# Altium PCB PCB1.PcbDoc
Units mil, origin at the board's own origin, x right, y up, seen from the top; angles counter-clockwise.
Board outline 4046.03 x 2791.03 mil, 4 copper layers (Top Layer, Mid-Layer, Signal Layer 1, Bottom Layer), stack 30.617 mil thick; 45 components, 39 nets, 154 pads, 26 vias.
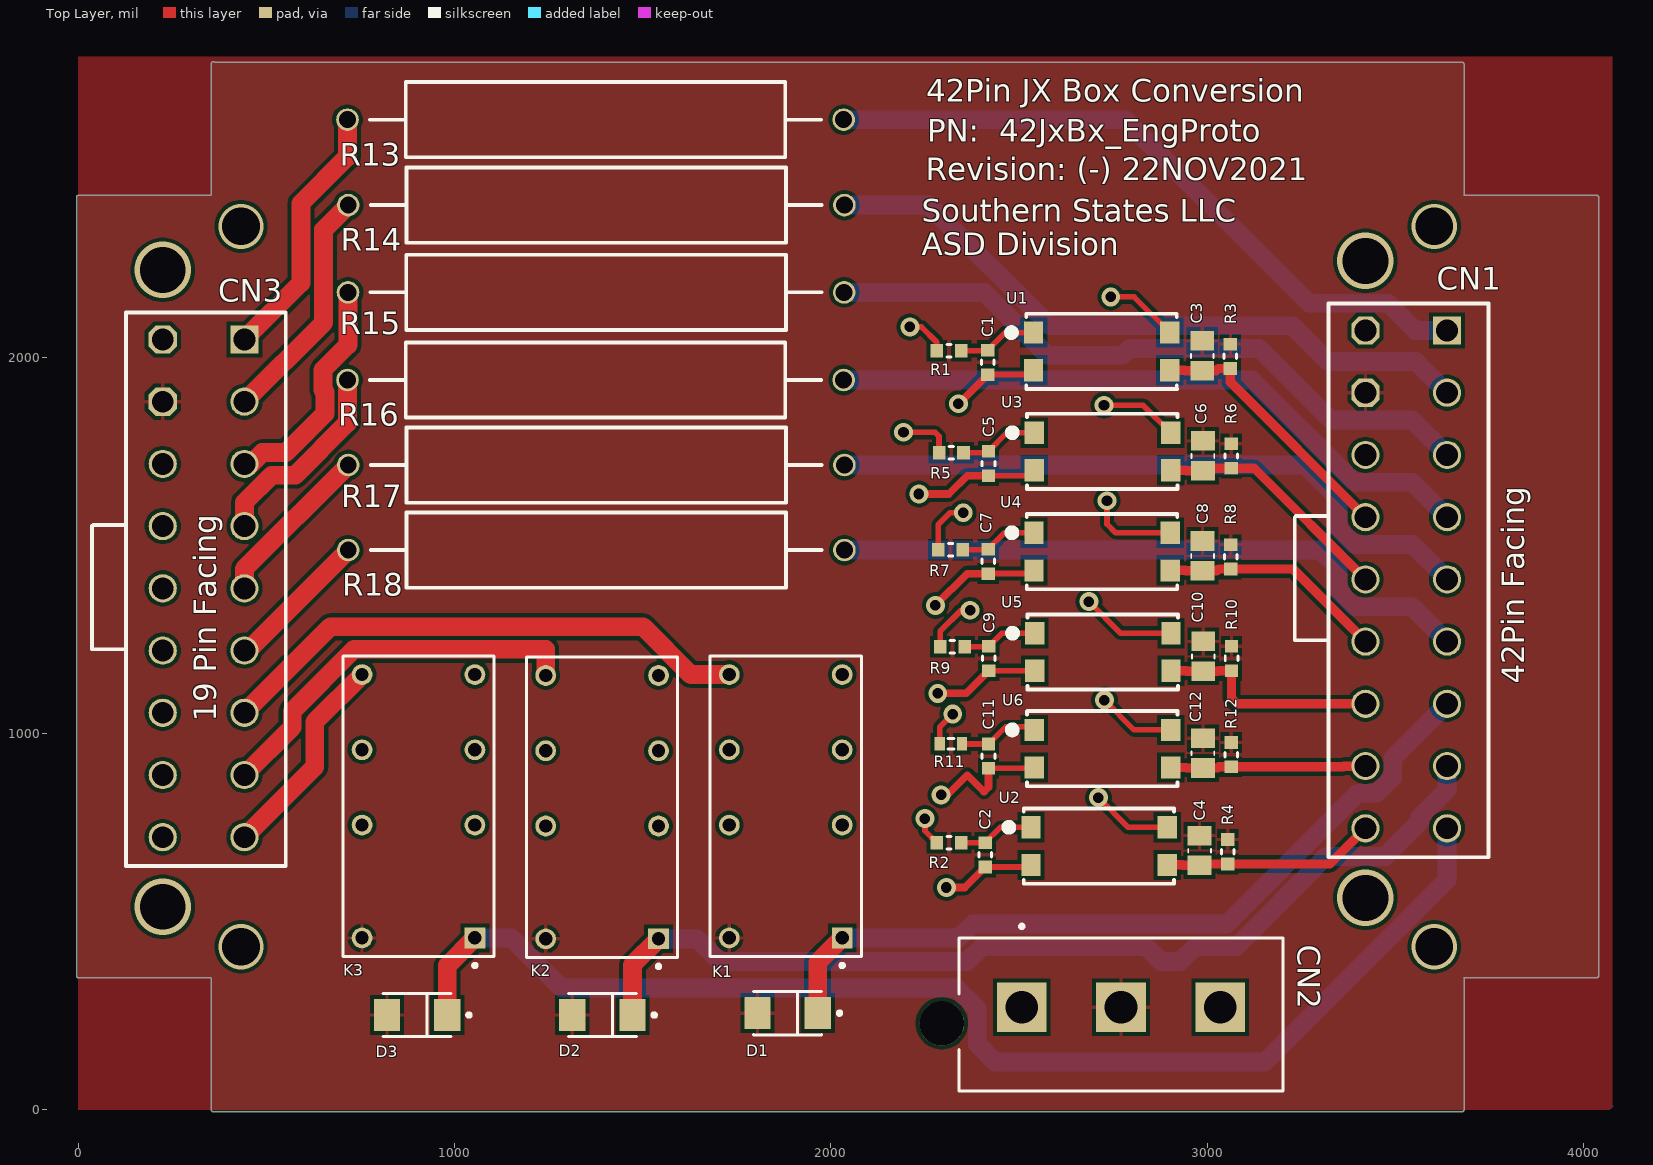
[diagram p0: Top Layer view]
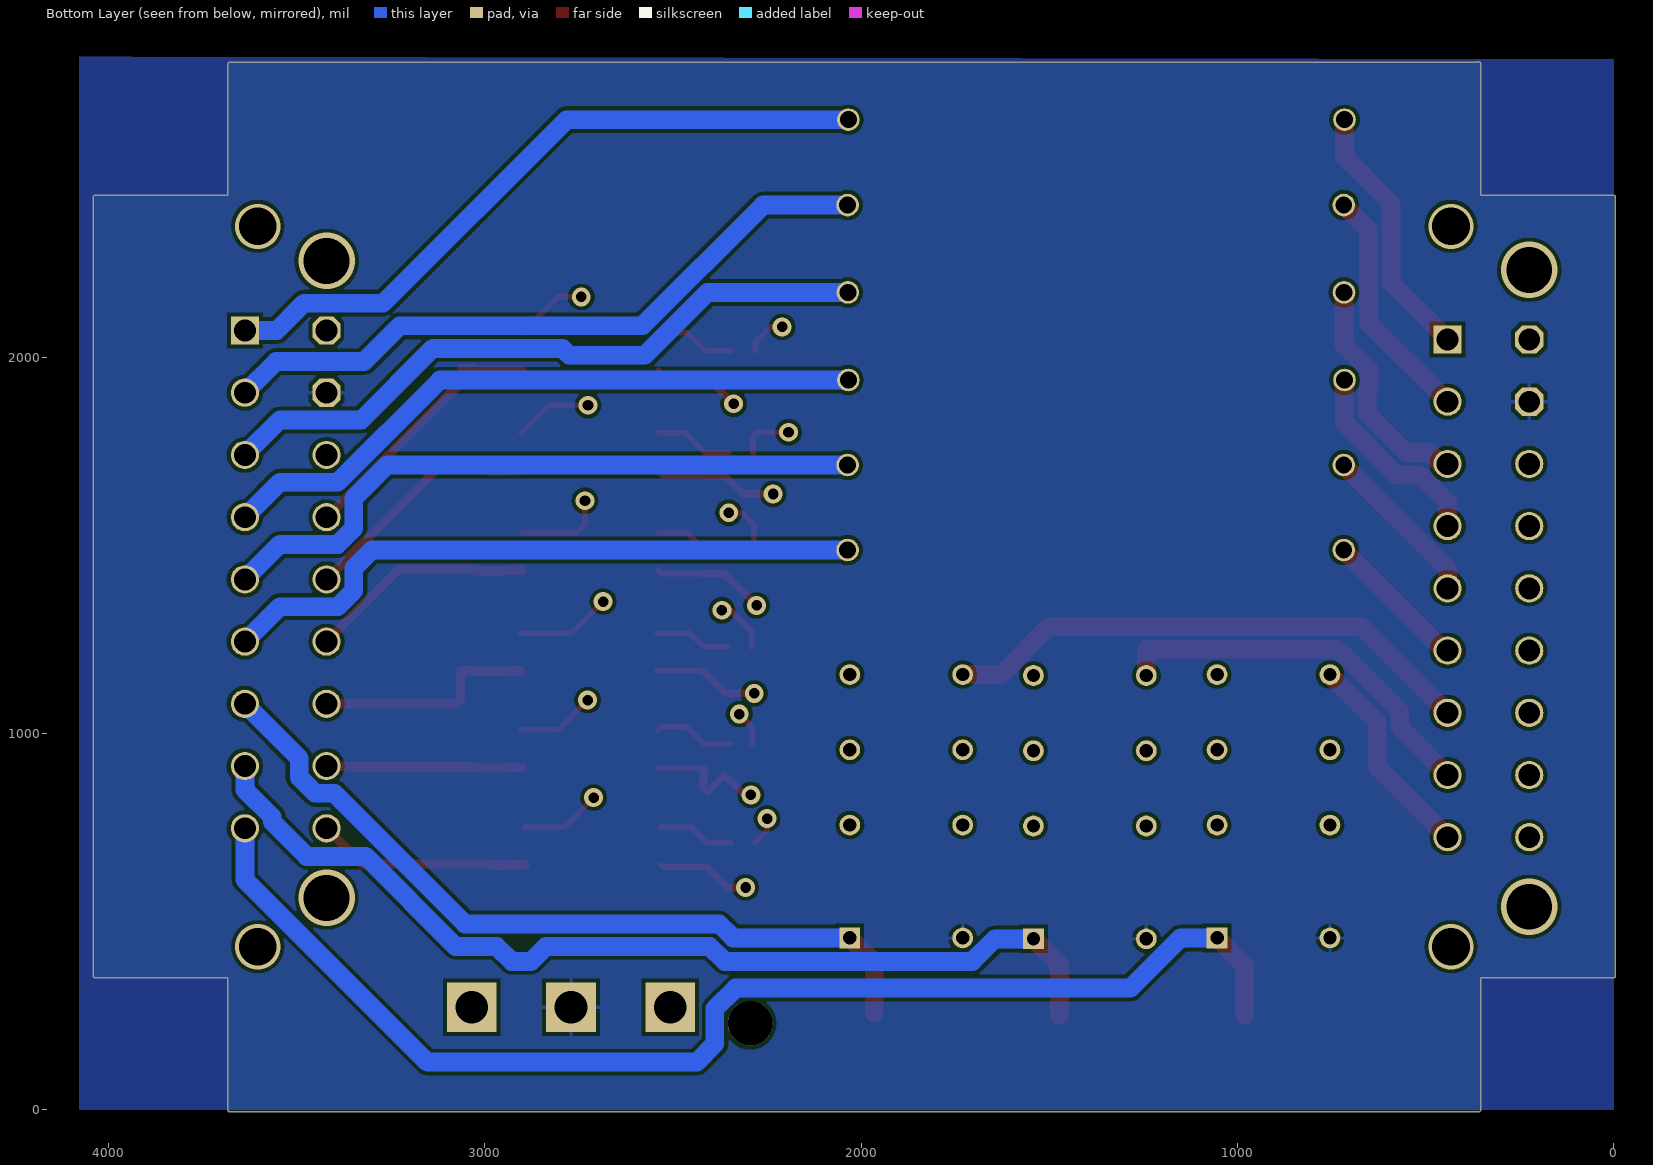
[diagram p1: Bottom Layer view, seen from below]
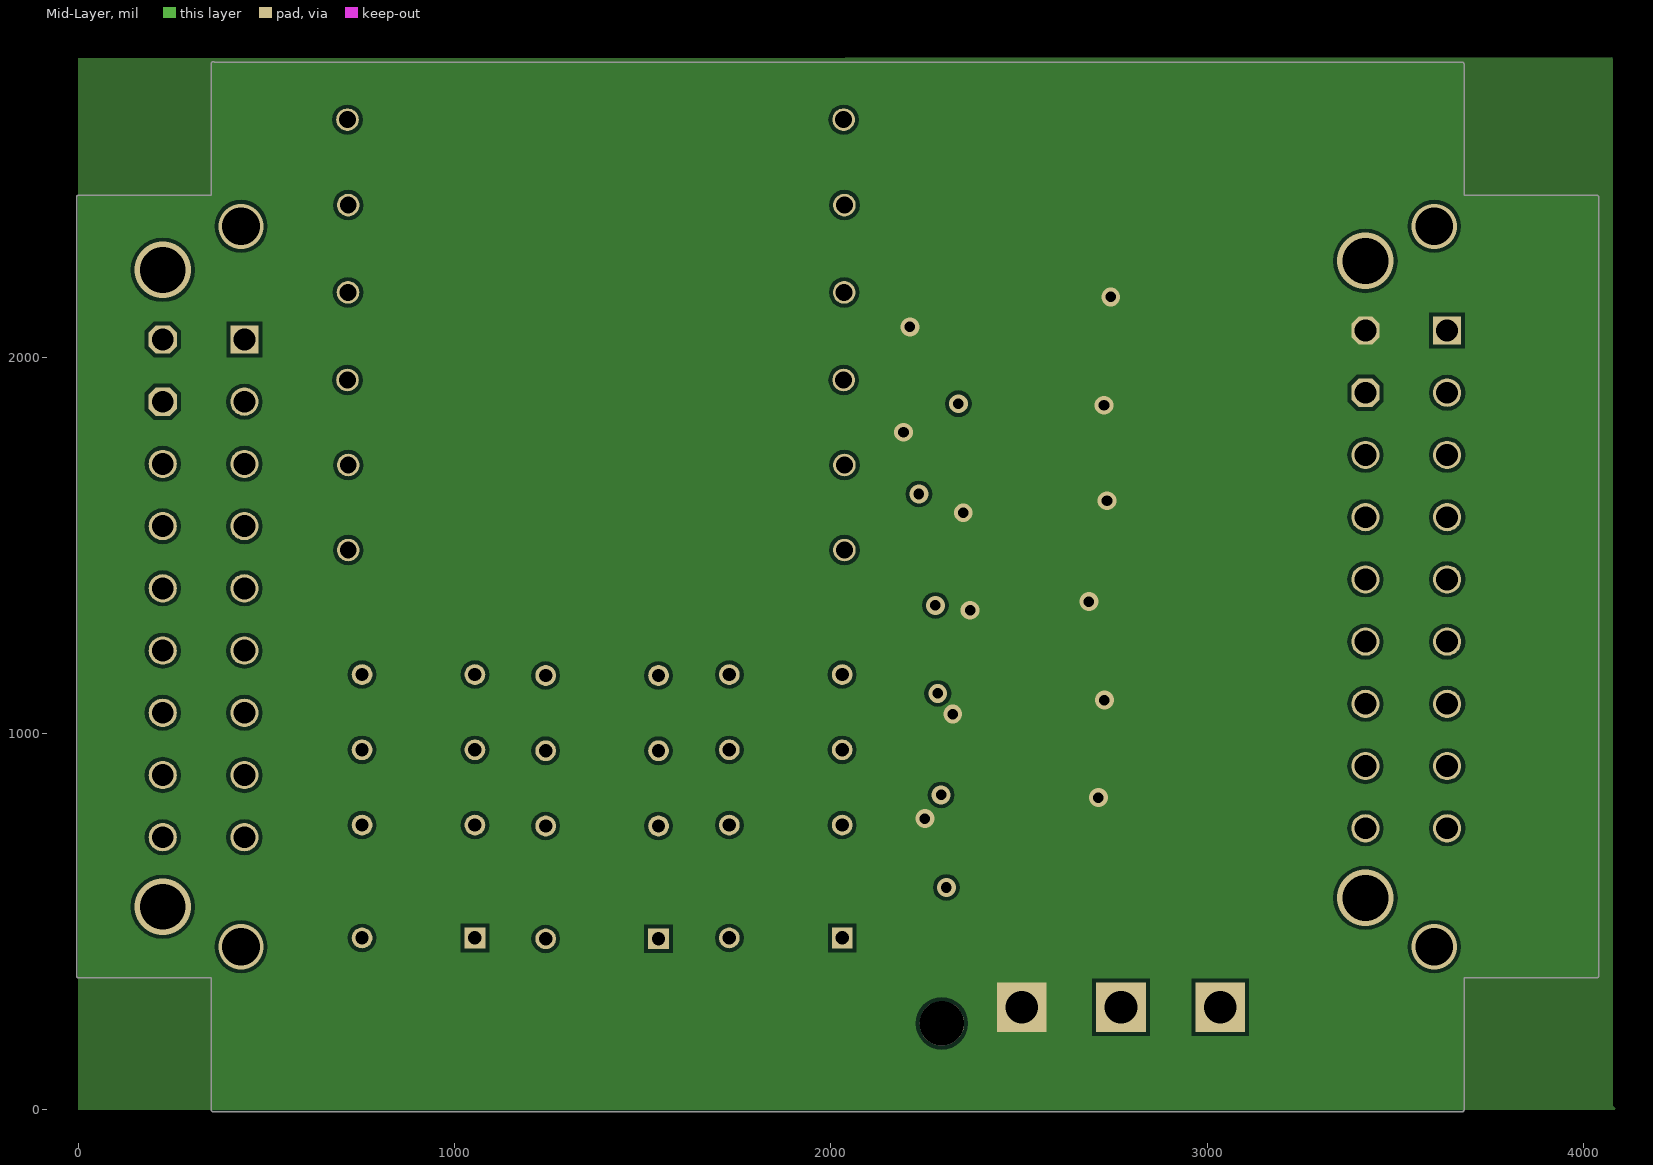
[diagram p2: Mid-Layer]
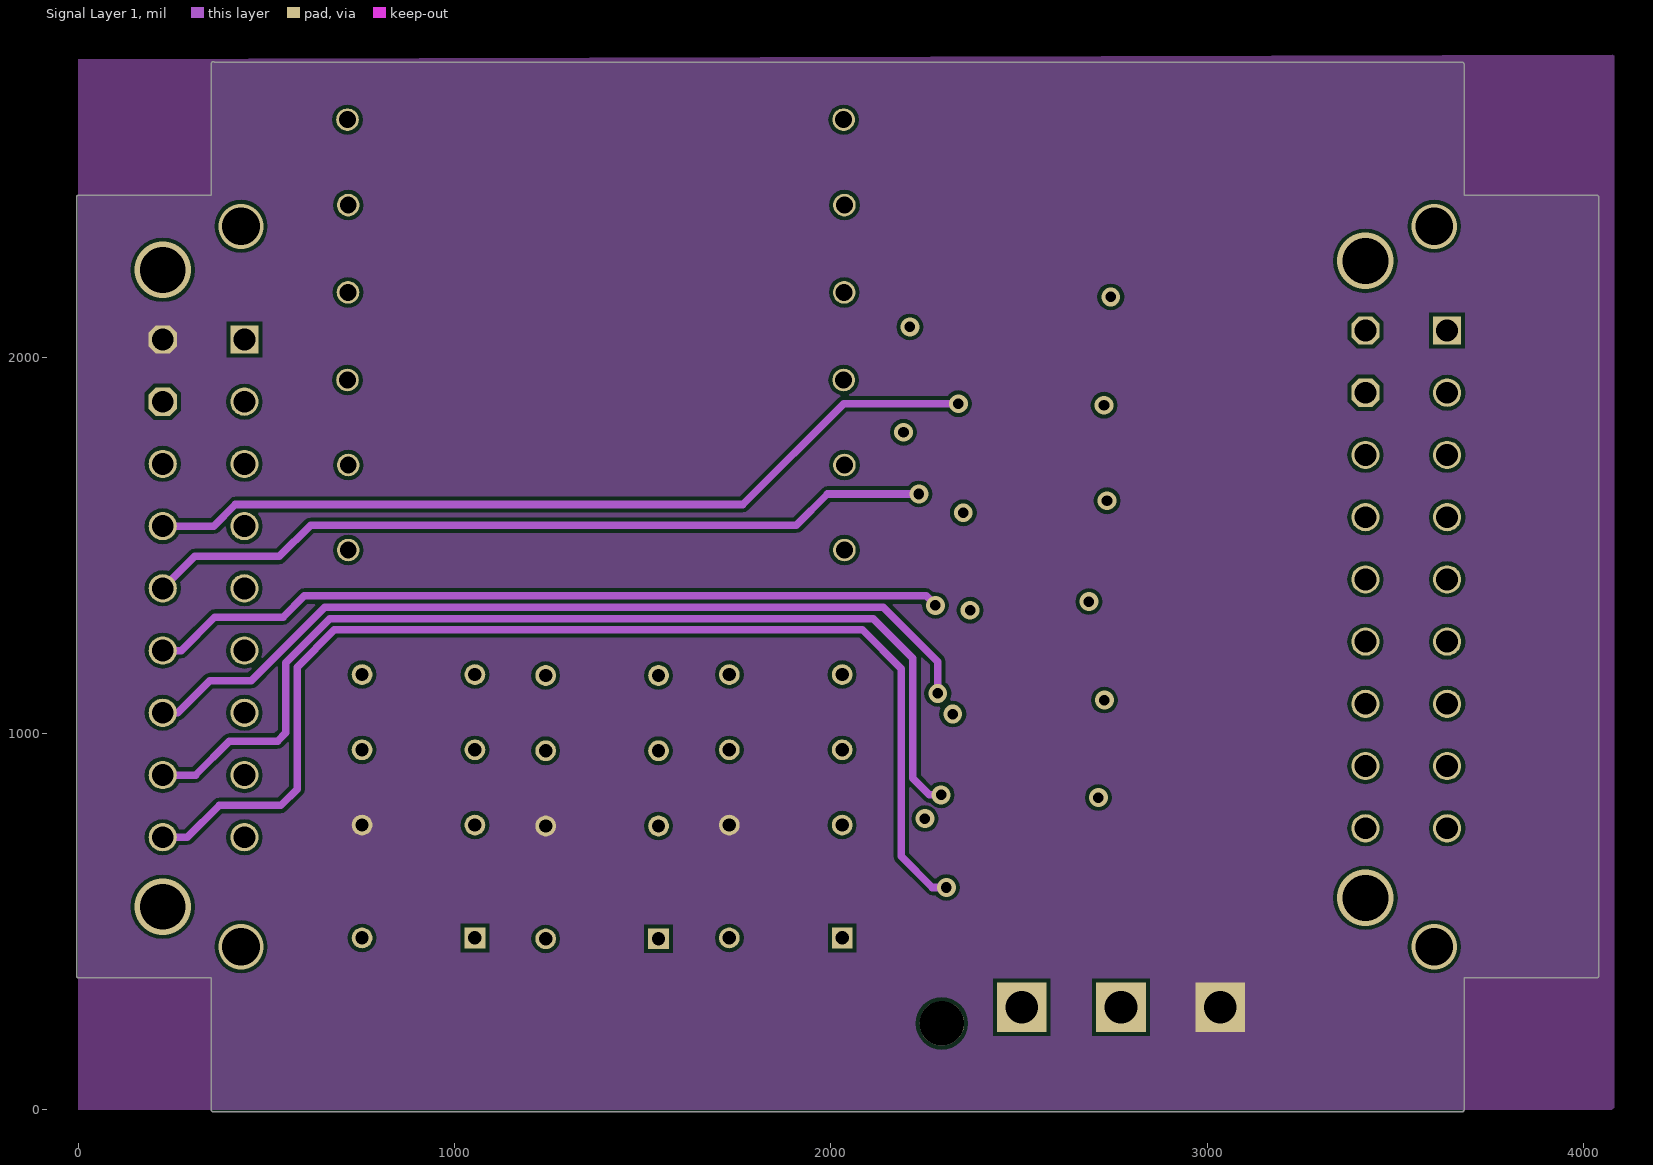
[diagram p3: Signal Layer 1]
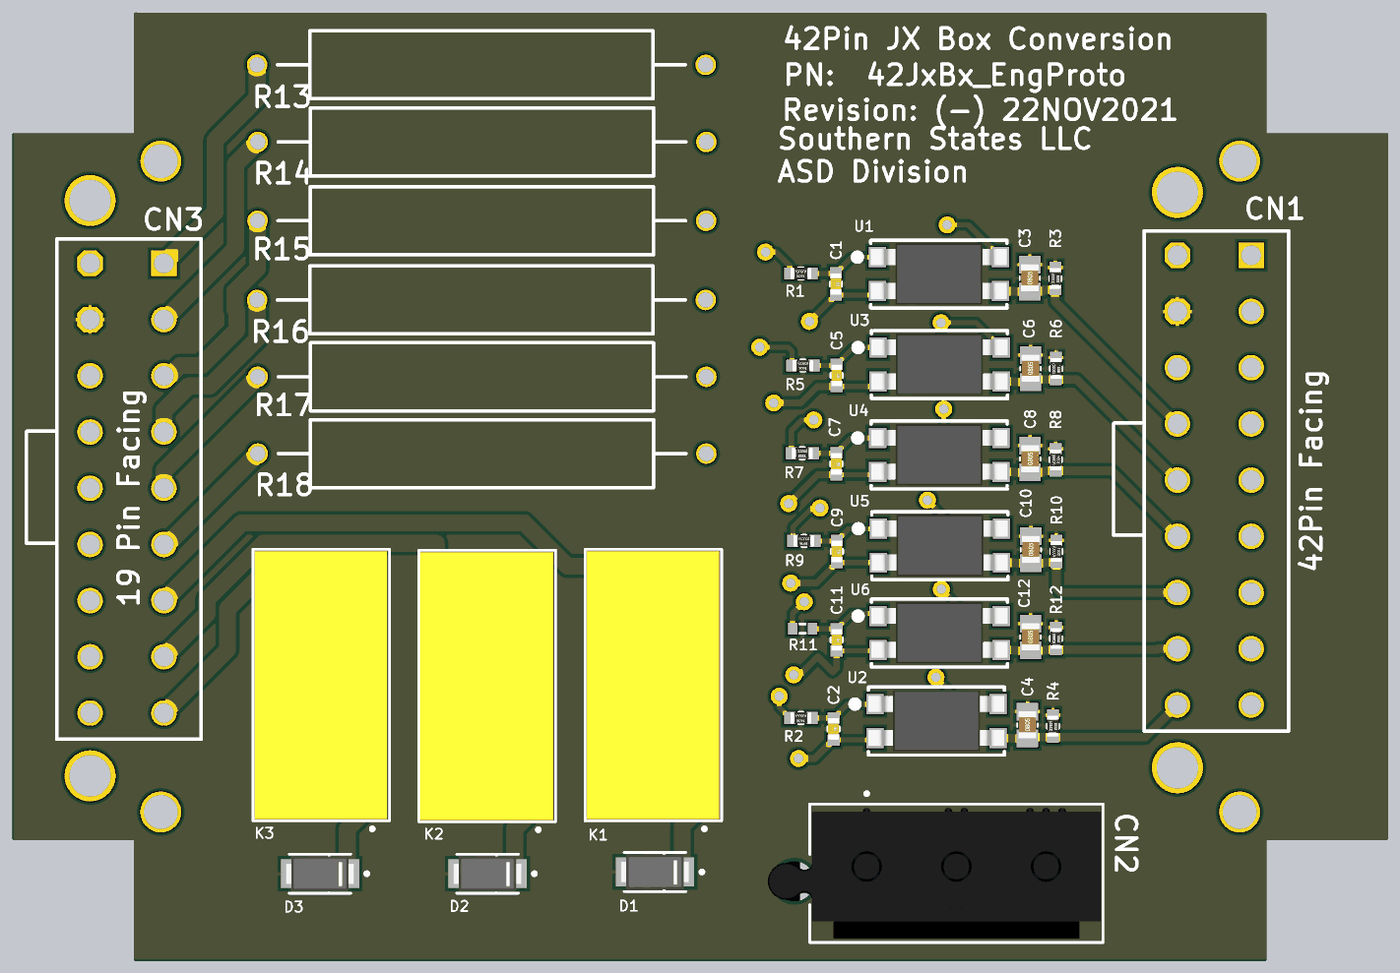
[diagram p4: 3D render of the assembled board from above, using the file's embedded part models]

## Layer stack, top to bottom
Top Solder: solder mask 0.4, Solder Resist, Dk 3.5
Top Layer: signal copper 1.4
Dielectric 1: core 10, FR-4, Dk 4.2
Mid-Layer: signal copper 1.4
Dielectric 3: prepreg 5, Dk 4.2
Signal Layer 1: signal copper 1.417
Dielectric2: core 10, FR-4, Dk 4.2
Bottom Layer: signal copper 1.4
Bottom Solder: solder mask 0.4, Solder Resist, Dk 3.5

## Board outline
352.99,0 352.99,350.99 0,350.99 cw(c0,356) -5.01,356 -5.01,2426 cw(c0,2426) 0,2431.01 352.99,2431.01 352.99,2781 cw(c358,2781) 361,2785.01 3678,2785.01 cw(c3678,2780) 3683.01,2780 3683.01,2431.01 4036,2431.01 cw(c4036,2426) 4041.01,2426 4041.01,356 cw(c4036,356) 4036,350.99 3683.01,350.99 3683.01,0 cw(c3678,0) 3678,-5.01 358,-5.01 cw(c358,0)

## Design rules (kind name [scope] priority, off if disabled: settings)
Clearance [All] p1: gap=10 ignorepadtopadclearanceinfootprint=FALSE except(0: Arc-Hole Track-Hole SMDPad-Hole THPad-Hole Via-Hole Fill-Hole Poly-Hole Region-Hole Text-Hole)
HoleSize [All] p1: absolutevalues=TRUE maxlimit=250 minlimit=1 maxpercent=80.000 minpercent=20.000
PolygonConnect PolygonConnect_4 [IsNamedPolygon('Mid-Layer-No Net')] p1: connectstyle=Direct reliefconductorwidth=10 reliefentries=2 polygonreliefangle="90 Angle" airgapwidth=10
PolygonConnect PolygonConnect_1 [IsNamedPolygon('Signal Layer 1-No Net')] p2: connectstyle=Direct reliefconductorwidth=10 reliefentries=2 polygonreliefangle="90 Angle" airgapwidth=10
PolygonConnect PolygonConnect_3 [InPolygonClass('All Polygons')] p3: connectstyle=Relief reliefconductorwidth=10 reliefentries=4 polygonreliefangle="90 Angle" airgapwidth=10
PolygonConnect [InNet('24VDC_Power') And (HasFootprint('0039299183')) vs InNet('12VDC_Power') And (HasFootprint('0039299183'))] p4: connectstyle=Direct reliefconductorwidth=10 reliefentries=2 polygonreliefangle="90 Angle" airgapwidth=10
PolygonConnect PolygonConnect_5 [InNet('GND')] p5: connectstyle=Direct reliefconductorwidth=10 reliefentries=4 polygonreliefangle="90 Angle" airgapwidth=10
PolygonConnect PolygonConnect_2 [InNetClass('All Nets')] p6: connectstyle=Relief reliefconductorwidth=10 reliefentries=2 polygonreliefangle="90 Angle" airgapwidth=10
RoutingVias [InNet('24VDC_Power')] p1: holewidth=28 width=50 viastyle="Through Hole" minholewidth=28 minwidth=50 maxholewidth=28 maxwidth=50
SolderMaskExpansion [All] p1: expansion=4 istentingtop=FALSE
Width [All] p1: maxlimit=100 minlimit=10 preferedwidth=25 minimp=50.000000 maximp=50.000000 favimp=50.000000
29 further rules are at their usual default settings.

## Classes and differential pairs
component class Sheet2: C1 C2 C3 C4 C5 C6 C7 C8 C9 C10 C11 C12 R1 R2 R3 R4 R5 R6 R7 R8 R9 R10 R11 R12 U1 U2 U3 U4 U5 U6
component class Sheet1: CN1 CN2 CN3 CN5 D1 D2 D3 D10 K1 K2 K3 R13 R14 R15 R16 R17 R18 R* R?

## Components (designator, comment, footprint, x,y, rotation, side; value= is the part's Value field where it differs from the comment)
C1 "100nF" C0603N 2417,1987 r270 top
C2 "100nF" C0603N 2410,678 r270 top
C3 "0.012uF" C0805K 2987,2004 r90 top
C4 "0.012uF" C0805K 2980,689 r90 top
C5 "100nF" C0603N 2419,1718 r270 top
C6 "0.012uF" C0805K 2989,1738 r90 top
C7 "100nF" C0603N 2418,1458 r270 top
C8 "0.012uF" C0805K 2988,1472 r90 top
C9 "100nF" C0603N 2420,1200 r270 top
C10 "0.012uF" C0805K 2990,1205 r90 top
C11 "100nF" C0603N 2419,940 r270 top
C12 "0.012uF" C0805K 2989,948 r90 top
CN1 "0039299183" 0039299183 3751,1086.6 r180 top
CN2 "15-31-1036" Molex_15-31-1036_0 2771.22,253.32 r180 top locked
CN3 "0039299183" 0039299183 554,1062.8 r180 top
D1 "S1A-13-F" Micro_Commercial_DO-214AC_MFG 1885,257 r180 top
D2 "S1A-13-F" Micro_Commercial_DO-214AC_MFG 1392.5,252 r180 top
D3 "S1A-13-F" Micro_Commercial_DO-214AC_MFG 900,252 r180 top
K1 "DS2Y-S-DC24V" Panasonic_DS2Y-S-DC24V_0 1880,807 r90 top
K2 "DS2Y-S-DC24V" Panasonic_DS2Y-S-DC24V_0 1391.88,804.48 r90 top
K3 "DS2Y-S-DC24V" Panasonic_DS2Y-S-DC24V_0 903.75,807 r90 top
R1 "10k" R0603N 2314,2018 r180 top
R2 "10k" R0603N 2314,710 r180 top
R3 "10k" R0603N 3062,2003 r270 top
R4 "10k" R0603N 3055,686 r270 top
R5 "10k" R0603N 2320,1747 r180 top
R6 "10k" R0603N 3064,1738 r270 top
R7 "10k" R0603N 2318,1489 r180 top
R8 "10k" R0603N 3063,1470 r270 top
R9 "10k" R0603N 2323,1231 r180 top
R10 "10k" R0603N 3065,1200 r270 top
R11 "Res3" J1-0603 2319,973 r0 top value=10K
R12 "10k" R0603N 3064,944 r270 top
R13 "AC07000001502JAC00" AC07000001502JAC00 2034,2632 r180 top
R14 "AC07000001502JAC00" AC07000001502JAC00 2036,2405 r180 top
R15 "AC07000001502JAC00" AC07000001502JAC00 2035.4,2173 r180 top
R16 "AC07000001502JAC00" AC07000001502JAC00 2034,1940 r180 top
R17 "AC07000001502JAC00" AC07000001502JAC00 2036,1714 r180 top
R18 "AC07000001502JAC00" AC07000001502JAC00 2036,1488 r180 top
U1 "FOD817DSD" "4-SMD GullWing" 2720,2016 r90 top
U2 "FOD817DSD" "4-SMD GullWing" 2713,701 r90 top
U3 "FOD817DSD" "4-SMD GullWing" 2722,1750 r90 top
U4 "FOD817DSD" "4-SMD GullWing" 2721,1484 r90 top
U5 "FOD817DSD" "4-SMD GullWing" 2723,1217 r90 top
U6 "FOD817DSD" "4-SMD GullWing" 2722,960 r90 top

## Footprints (in the part's own frame and the unit in brackets; to place one, negate y for a bottom-side part, rotate by r counter-clockwise, add the part's x,y. Pads: shape width x height; smd on the part's side, far side on the other; paste and mask are expansions set on the pad)
"4-SMD GullWing" [mm]
  rect 1.5x1.3 smd: 1(1.27,4.6) 2(-1.27,4.6) 3(-1.27,-4.6) 4(1.27,-4.6)
  silkscreen extent -2.54,-5.08 2.54,6.35, body extent -2.28,-5.06 2.31,5.1, height 3.76
0039299183 [mil]
  rect 75x75 hole 58: 1(113,-985)
  round 75 hole 58: 2(113,-819.6) 3(113,-654.2) 4(113,-488.8) 5(113,-323.4) 6(113,-158) 7(113,7.4) 8(113,172.8) 9(113,338.2) 12(330,-654.2) 13(330,-488.8) 14(330,-323.4) 15(330,-158) 16(330,7.4) 17(330,172.8) 18(330,338.2)
  oct 75x75 hole 58: 10(330,-985) 11(330,-819.6)
  silkscreen extent 3,-1057 518,415
AC07000001502JAC00 [mil]
  round 60 hole 45: 1(0,0) 2(1319,0)
  silkscreen extent 60,-100 1259,100
C0603N [mm]
  rect 0.85x0.9 smd: 1(-0.825,0) 2(0.825,0)
  silkscreen extent -0.15,-0.42 0.15,0.42, body extent -0.8,-0.4 0.8,0.4, height 0.29
C0805K [mil] "C0805K"
  rect 52x63 smd: 1(-39.37,0) 2(40,0)
  silkscreen extent -5,-30 5,30, body extent -39,-26 41,27, height 22
J1-0603 [mm] "Chip Resistor, Body 1.6x0.8mm, IPC High Density"
  rect 0.7x0.9 smd: 1(-0.75,0) 2(0.75,0)
  silkscreen extent -0.2,-0.35 0.2,0.35, body extent -0.85,-0.48 0.85,0.48, height 0.9
Micro_Commercial_DO-214AC_MFG [mil]
  rect 70x85 smd paste+0 mask+0: 1(-80,0) 2(80,0)
  silkscreen extent -143,-57 91,57, body extent -119,-61 119,61, height 10
Molex_15-31-1036_0 [mm]
  rect 3.35x3.35 hole 2.2 paste-1000 mask+0: 1(6.7,-0.5) 2(0,-0.5) 3(-6.7,-0.5)
  round 3 hole 3 unplated paste-1000 mask+0: ""(12.1,0.6)
  silkscreen extent -10.95,-6.07 10.95,5.18, body extent -11.05,-5.28 13.7,5.28, height 0.25
Panasonic_DS2Y-S-DC24V_0 [mm]
  rect 1.4x1.4 hole 0.9 paste-1000 mask+0: 1(-8.89,-3.81)
  round 1.4 hole 0.9 paste-1000 mask+0: 4(-1.27,-3.81) 6(3.81,-3.81) 8(8.89,-3.81) 9(8.89,3.81) 11(3.81,3.81) 13(-1.27,3.81) 16(-8.89,3.81)
  silkscreen extent -10.87,-5.1 10.15,5.1, body extent -10.25,-5.2 10.25,5.2, height 0.25
R0603N [mm]
  rect 0.85x0.9 smd: 1(-0.825,0) 2(0.825,0)
  silkscreen extent -0.15,-0.42 0.15,0.42, body extent -0.77,-0.42 0.78,0.43, height 0.45

## Part data
C1 C2 C5 C7 C9 C11: library part CAP_0603, "CAP CER 10% 0603", Manufacturer=?, Temp=X7R, Voltage=35V, Alternate Allowed=?, Mount=SMT, Part Number=?, PartNumber-Prime=?
C3 C4 C6 C8 C10 C12: library part CAP_0805, "CAP CER 10% 0805", Manufacturer=?, Voltage=50V, Alternate Allowed=?, Mount=SMT, PartNumber=?, PartNumber-Prime=?, Temp=?
CN1 CN3: library part "0039299183 - 18 pin molex mini fit jr 5566", "Connector Header Through Hole 18 position 0.165\" (4.20mm)"
D1 D2 D3: library part FM2000GP
R1 R2 R5 R7 R9: library part RES_1/10W_0603_1%, "RES SMD 1/10W 0603 1%", Manufacturer=?, Power=1/10W, Tolerance=1%, Alternate Allowed=?, Manufacturer Part Number=?, Mount=SMT, Part Number-Prime=?
R3 R4 R6 R8 R10 R12: library part RES_1/10W_0603_0.1%, "RES SMD 1/10W 0603 0.1%", Manufacturer=?, Power=1/10W, Tolerance=0.1%, Alternate Allowed=?, Manufacturer Part Number=?, Mount=SMT, Part Number-Prime=?
R11: "Resistor", LatestRevisionDate=29-May-2009, LatestRevisionNote="IPC-7351 Footprint Added.", PackageDescription="Chip Resistor", PackageReference=J1-0603, Published=8-Jun-2000, Publisher="Altium Limited"
R13 R14 R15 R16 R17 R18: Case/Package=Axial, Manufacturer="Vishay BCcomponents", Max Operating Temperature=275°C, Max Power Dissipation=7W, Min Operating Temperature=-40°C, Package Quantity=1, Resistance=15kR, Resistance Tolerance=5%, Resistor Type=Wirewound, Supplier Part Number 1=PPC7W15.0KCT-ND, Temperature Coefficient=180ppm/°C, Voltage Rating=324V, ComponentLink1Description=http://www.vishay.com/docs/28730/acseries.pdf?src-supplier=Avnet, ComponentLink1URL=http://www.vishay.com/docs/28730/acseries.pdf?src-supplier=Avnet, ComponentLink2Description=http://www.vishay.com/docs/28730/acseries.pdf?src-supplier=Avnet+Europe, ComponentLink2URL=http://www.vishay.com/docs/28730/acseries.pdf?src-supplier=Avnet+Europe, ComponentLink3Description=http://www.vishay.com/docs/28730/acac-at.pdf?src-supplier=Digi-Key, ComponentLink3URL=http://www.vishay.com/docs/28730/acac-at.pdf?src-supplier=Digi-Key, Contact Plating=Tin, Diameter=7.5mm, Features="Flame Retardant Coating", Length=1.024inch, Manufacturer Part Number=AC07000001502JAC00, Mount="Through Hole", Number of Pins=2, Number of Terminations=2, Packaging="Tape and Reel", Power Rating=7W, Pricing 1="1=2.26, 10=2.002, 25=1.8564, 50=1.7472, 100=1.5288, 250=1.3104 (USD)", Radiation Hardening=No, RoHS Compliant=Yes, Series=AC, Stock 1=0, Supplier 1=Digi-Key, Termination=Axial, Tolerance=5%, Voltage Rating (DC)=324V, Width=7.49mm
U1 U2 U3 U4 U5 U6: library part 108-00030-001, "OPTOISOLATOR 5KV TRANSISTOR 4SMD", Manufacturer=Fairchild, Part Number-Prime=?, Supplier Part Number 1=FOD817DSDCT-ND, Temp="-55C, +110C", Manufacturer Part Number=FOD817DSD, Mount=SMT, Part Number-ASD=108-00030-001, Price=0.30, Supplier 1=Digi-Key

## Via types
v1: diameter 50, hole 28, Top Layer to Bottom Layer, 18 vias
v2: diameter 150, hole 122, Top Layer to Bottom Layer, 4 vias
v3: diameter 120, hole 100, Top Layer to Bottom Layer, 4 vias

## Nets (pads, with @x,y where several pads share a name; then routed paths per layer and width w, separated by ;. In a path a pad name is that pad's centre, name@x,y a point inside that pad or via, vN(x,y) a via of type N, cw(c..) or ccw(c..) an arc to the next point about the centre after c; other vN are vias at no path point)
12VDC_Power: CN1.10 CN2.1 R1.2 R2.2 R5.2 R7.2 R9.2 R11.1 U1.4 U2.4 U3.4 U4.4 U5.4 U6.4 | length 2035.7
  Top Layer w15: v1(2193,1801) 2277,1801 2287.52,1790.48 R5.2 ; v1(2210,2081) 2241.04,2081 2281.52,2040.52 R1.2 ; v1(2250,774) 2250,741.52 R2.2 ; R7.2 2285.52,1555.52 2317,1587 v1(2352,1587) ; R11.1 2289.47,1017.47 v1(2324,1052) ; R9.2@2292,1231 R9.2 2290.52,1272 2346.52,1328 v1(2370,1328) ; v1(2686,1351) 2770,1267 U5.4 ; v1(2711,830) 2790,751 U2.4 ; v1(2726,1873) 2830.1,1873 U3.4 ; v1(2727,1089) 2806,1010 U6.4 ; v1(2734,1619) 2734,1557 2757,1534 U4.4 ; v1(2744,2161) 2806.1,2161 U1.4
24VDC_Power: CN2.3 CN3.10 K1.13 K2.13 K3.13
Close1(155V): CN1.2 R14.1 | length 1808.6
  Bottom Layer w50: R14.1 2260.47,2405 2581.37,2084.1 3226.2,2084.1 3321.5,1988.8 3555.4,1988.8 CN1.2
Close2(155V): CN1.4 R16.1 | length 1755
  Bottom Layer w50: R16.1 3119.27,1940 3390.97,1668.3 3545.1,1668.3 CN1.4
Close3(155V): CN1.6 R18.1 | length 1738
  Bottom Layer w50: R18.1 3300.53,1488 3348.5,1440.03 3348.5,1379.97 3390.97,1337.5 3545.1,1337.5 CN1.6
CloseA(24V): CN3.2 R14.2 | length 636.9
  Top Layer w50: CN3.2 651.4,2092.8 651.4,2339.4 R14.2
CLOSEA_STATUS: C9.2 CN3.16 U5.2 | length 2603.5
  Top Layer w15: C9.2 2541.38,1167.52 U5.2
  Top Layer w20: v1(2284,1107) 2359.48,1107 C9.2
  Signal Layer 1 w20: CN3.16 263.4,1055.4 349,1141 459,1141 654,1336 2139,1336 2284,1191 v1(2284,1107)
CLOSEA_STATUS_RELAY: C10.1 CN1.16 R10.2 U5.3 | length 598.5
  Top Layer w25: U5.3 2944,1167 2945.37,1165.63 C10.1 3028.63,1165.63 3030.52,1167.52 R10.2 3065,1093 3078.8,1079.2 CN1.16
CloseB(24V): CN3.4 R16.2 | length 538.5
  Top Layer w50: CN3.4 441,1614.47 513.5,1686.97 575.97,1686.97 715,1826 R16.2
CLOSEB_STATUS: C11.2 CN3.17 U6.2 | length 3076.2
  Top Layer w15: C11.2 2538.42,907.52 U6.2
  Top Layer w20: v1(2293,837) 2310,837 2363,890 2407,846 2419,858 C11.2
  Signal Layer 1 w20: CN3.17 311,890 401,980 529,980 551,1002 551,1189 668,1306 2113,1306 2218,1201 2218,881 2262,837 v1(2293,837)
CLOSEB_STATUS_RELAY: C12.1 CN1.17 R12.2 U6.3 | length 520.6
  Top Layer w25: U6.3 2943,910 2944.37,908.63 C12.1 3027.63,908.63 3030.52,911.52 R12.2 3361.52,911.52 3363.8,913.8 CN1.17
CloseC(24V): CN3.6 R18.2 | length 386.7
  Top Layer w50: CN3.6 449.8,1220.8 R18.2
CLOSEC_STATUS: C2.2 CN3.18 U2.2 | length 3327.3
  Top Layer w15: C2.2 2526.42,645.52 U2.2
  Top Layer w20: v1(2307,591) 2355.48,591 C2.2
  Signal Layer 1 w20: CN3.18 289.6,724.6 374,809 538,809 581,852 581,1176.57 680.43,1276 2084,1276 2187,1173 2187,674 2270,591 v1(2307,591)
CLOSEC_STATUS_RELAY: C4.1 CN1.18 R4.2 U2.3 | length 570.7
  Top Layer w25: U2.3 2934,651 2935.37,649.63 C4.1 2980,653.52 R4.2 3326.12,653.52 CN1.18
"Fault Indicator A (12V)": CN1.7 D1.1 K1.1 | length 2122.5
  Top Layer w50: D1.1 1965,392 K1.1
  Bottom Layer w50: K1.1 2340.35,457 2377.29,493.94 3052.74,493.94 3400.1,841.3 3451.03,841.3 3493.5,883.77 3493.5,934.7 CN1.7
"Fault Indicator A (24V)": CN3.7 K1.9 | length 1436.4
  Top Layer w50: CN3.7 669.72,1284.12 1500.7,1284.12 1627.83,1157 K1.9
"Fault Indicator B (12V)": CN1.8 D2.1 K2.1 | length 2644.6
  Top Layer w50: D2.1 1472.5,385.1 K2.1
  Bottom Layer w50: K2.1 1644.05,454.48 1704.09,394.44 2362.64,394.44 2402.14,433.94 2837.89,433.94 2877.39,394.44 2928.83,394.44 2968.33,433.94 3077.6,433.94 3317.25,673.6 3473.89,673.6 3565.5,765.21 3565.5,778.43 3638,850.93 CN1.8
"Fault Indicator B (24V)": CN3.8 K2.9 | length 1033.9
  Top Layer w50: CN3.8 568,1017 568,1059.72 732.4,1224.12 1241.88,1224.12 K2.9
"Fault Indicator C (12V)": CN1.9 D3.1 K3.1 | length 3348.5
  Top Layer w50: D3.1 980,383.25 K3.1
  Bottom Layer w50: K3.1 1150.88,457 1284.13,323.75 2333.8,323.75 2388.9,268.65 2388.9,175.1 2437,127 3152.88,127 3638,612.12 CN1.9
"Fault Indicator C (24V)": CN3.9 K3.9 | length 561.9
  Top Layer w50: CN3.9 628,911.6 628,1031.25 K3.9
GND: C3.2 C4.2 C6.2 C8.2 C10.2 C12.2 CN1.11 CN2.2 CN3.11 D1.2 D2.2 D3.2 K1.16 K2.16 K3.16 R3.1 R4.1 R6.1 R8.1 R10.1 R12.1
NetC1_1: C1.1 R1.1 U1.1 | length 212.3
  Top Layer w15: R1.1 2415.52,2018 C1.1 2463.52,2066 U1.1
NetC2_1: C2.1 R2.1 U2.1 | length 202.4
  Top Layer w15: R2.1 2409.52,710 C2.1 2450.52,751 U2.1
NetC5_1: C5.1 R5.1 U3.1 | length 210.4
  Top Layer w15: R5.1 2415.52,1747 C5.1 2468.52,1800 U3.1
NetC7_1: C7.1 R7.1 U4.1 | length 208.1
  Top Layer w15: R7.1 2416.52,1489 C7.1 2461.52,1534 U4.1
NetC9_1: C9.1 R9.1 U5.1 | length 201.3
  Top Layer w15: R9.1 2418.52,1231 C9.1 2454.52,1267 U5.1
NetC11_1: C11.1 R11.2 U6.1 | length 214.8
  Top Layer w15: R11.2 2349.05,972.48 C11.1 2464.52,1018 2532.9,1018 U6.1
OPENA_STATUS: C1.2 CN3.13 U1.2 | length 2486.5
  Top Layer w15: C1.2 2527.42,1954.52 U1.2
  Top Layer w20: v1(2339,1877) 2339.48,1877 C1.2
  Signal Layer 1 w20: CN3.13 359.68,1551.6 417.18,1609.1 1766.1,1609.1 2034,1877 v1(2339,1877)
OPENA_STATUS_RELAY: C3.1 CN1.13 R3.2 U1.3 | length 707.7
  Top Layer w25: U1.3 2941,1966 2942.37,1964.63 C3.1 3023.63,1964.63 3029.52,1970.52 R3.2 3062,1934.4 CN1.13
OPENB_STATUS: C5.2 CN3.14 U3.2 | length 2450
  Top Layer w15: C5.2 2526.42,1685.52 U3.2
  Top Layer w20: CN3.14 CN3.14@226.2,1384 ; v1(2234,1637) 2313.84,1637 2362.36,1685.52 C5.2
  Signal Layer 1 w20: CN3.14 308.8,1471 534,1471 617,1554 1908,1554 1991,1637 v1(2234,1637)
OPENB_STATUS_RELAY: C6.1 CN1.14 R6.2 U3.3 | length 647.8
  Top Layer w25: U3.3 2943,1700 2944.37,1698.63 C6.1 2989,1705.52 R6.2 3125.48,1705.52 CN1.14
OPENC_STATUS: C7.2 CN3.15 U4.2 | length 2424.9
  Top Layer w15: C7.2 2531.42,1425.52 U4.2
  Top Layer w20: v1(2278,1341) 2362.52,1425.52 C7.2
  Signal Layer 1 w20: CN3.15 272.8,1220.8 362,1310 544,1310 600,1366 2253,1366 v1(2278,1341)
OPENC_STATUS_RELAY: C8.1 CN1.15 R8.2 U4.3 | length 601.4
  Top Layer w25: U4.3 2942,1434 2943.37,1432.63 C8.1 3025.63,1432.63 3030.52,1437.52 R8.2 3228.08,1437.52 CN1.15
Trip1(155V): CN1.1 R13.1 | length 1836.1
  Bottom Layer w50: R13.1 2783,2632 3270.9,2144.1 3481,2144.1 3553.5,2071.6 CN1.1
Trip2(155V): CN1.3 R15.1 | length 1796.6
  Bottom Layer w50: R15.1 2407.62,2173 2574.62,2006 2775.85,2006 2793.95,2024.1 3138.26,2024.1 3328.66,1833.7 3545.1,1833.7 CN1.3
Trip3(155V): CN1.5 R17.1 | length 1775.1
  Bottom Layer w50: R17.1 3260.42,1714 3348.5,1625.92 3348.5,1545.37 3390.97,1502.9 3545.1,1502.9 CN1.5
TripA(24V): CN3.1 R13.2 | length 697.7
  Top Layer w50: CN3.1 591.4,2198.2 591.4,2409.4 715,2533 R13.2
TripB(24V): CN3.3 R15.2 | length 621.2
  Top Layer w50: CN3.3 458.68,1717 488.65,1746.97 551.12,1746.97 655,1850.85 655,1908.08 650,1913.08 650,1966.92 716.4,2033.32 R15.2
TripC(24V): CN3.5 R17.2 | length 442.1
  Top Layer w50: CN3.5 441,1438 R17.2
pads on no net: CN1.12 CN2. CN3.12 K1.4 K1.6 K1.8 K1.11 K2.4 K2.6 K2.8 K2.11 K3.4 K3.6 K3.8 K3.11
copper on no net:
  other v2: 224,539.8 3421,563.6 224,2232.8 3421,2256.6
  other v3: 432,433.5 3604,433.5 432,2348.5 3604,2348.5

## Polygon pours and split planes (outlines as drawn)
12VDC_Power on Mid-Layer "Mid-Layer-No Net" (solid, pour order 2): 0,2795 0,0 4090,0 4079,11 4079,2798
24VDC_Power on Signal Layer 1 "Signal Layer 1-No Net" (solid, pour order 4): 0,2792 0,0 4076,0 4082,6 4082,2805
GND on Top Layer "GND_L01_P007" (solid, pour order 7): 0,2799 0,0 4071,0 4080,9 4077,12 4077,2799
GND on Top Layer "GND_L01_P010" (solid, pour order 10): 3345.67,1970.52 3345.67,1840 3509,1840 3506,1843 3506,1970.52
GND on Bottom Layer "Bottom Layer-No Net" (solid, pour order 6): 0,2792 0,0 4079,0 4079,2798 4080,2799 3940,2799

## Silkscreen, mask and mechanical layers (free items; w line width, h text height)
Top Overlay:
  text "42Pin JX Box Conversion" at 2254,2680 h60
  text "PN:  42JxBx_EngProto" at 2256,2574 h60
  text "Revision: (-) 22NOV2021" at 2252,2471 h60
  text "Southern States LLC / ASD Division" at 2241,2271 h60
  text "42Pin Facing" at 3843,1132 h60 r90
  text "19 Pin Facing" at 366,1031 h60 r90
Mechanical 1:
  text "EB - Pilot Only / Black Soldermask / White Silkscreen /  / Must meet IPC-6012C /  / 62 mils Standard  Board +/- 10% / 2 oz Copper / Gold Immersion / FR406 /  / Stack: / Top Signal/GND Pour - Copper 1.35 mils / Prepreg 9.8 mils / Mid Signal/GND Pour - Copper 1.35 mils / Core 39 mils / Mid Signal/GND Pour - Copper 1.35 mils / Prepreg 9.8 mils / Bottom Signal/GND Pour - Copper 1.35 mils" at 4451,58 h60
Mechanical 2:
  lines w10: 7052,2425 7521,2425 12823,2425 14097,2425 14566,2425 ; 7054,1820.2 7523,1820.2 12825,1820.2 14099,1820.2 14568,1820.2 14568,2422.2 ; 7054,2425.2 7523,2425.2 12825,2425.2 14099,2425.2 14568,2425.2 14568,3027.2 ; 7521,3625.68 7521,3027.52 ; 12823,3623 12823,3027.52 ; 14097,3621.68 14097,3027.52 ; 14568,4225.69 15593,4225.69 ; 15593,3623.68 15593,4225.69 ; 17643,2421.68 16618,2421.68 ; 17643,4218.69 17643,4225.69 16618,4225.69 15593,4225.69 ; 7052,1218 7521,1218 ; 7052,1218 7052,1820 7521,1820 ; 7052,1218 7521,1218 ; 7052,1820.52 7521,1820.52 ; 7052,1820.52 7052,2422.52 7521,2422.52 ; 7052,1820.52 7521,1820.52 ; 7052,2425.52 7521,2425.52 ; 7052,2425.52 7052,3027.52 ; 7052,2425.52 7521,2425.52 ; 7052,3027.52 7521,3027.52 ; 7052,3027.52 7052,3394 7283.69,3625.68 14568,3625.68 ; 7054,615.68 7523,615.68 ; 7054,615.68 7054,1217.68 7523,1217.68 ; 7054,615.68 7054,13.69 7523,13.69 ; 7054,615.68 7523,615.68 ; 7521,1218 7521,1820 ; 7521,1218 12823,1218 ; 7521,1218 12823,1218 ; 7521,1820 12823,1820 ; 7521,1820.52 12823,1820.52 ; 7521,1820.52 12823,1820.52 ; 7521,1820.52 7521,2422.52 ; 7521,2422.52 12823,2422.52 ; 7521,2425.52 7521,3027.52 ; 7521,2425.52 12823,2425.52 ; 7521,2425.52 12823,2425.52 ; 7521,3027.52 12823,3027.52 ; 7523,13.69 12825,13.69 ; 7523,13.69 7523,615.68 ; 7523,615.68 7523,1217.68 ; 7523,615.68 12825,615.68 ; 7523,615.68 12825,615.68 ; 7523,1217.68 12825,1217.68 ; 12823,1218 12823,1820 ; 12823,1218 14097,1218 ; 12823,1218 14097,1218 ; 12823,1820 14097,1820 ; 12823,1820.52 14097,1820.52 ; 12823,1820.52 14097,1820.52 ; 12823,1820.52 12823,2422.52 ; 12823,2422.52 14097,2422.52 ; 12823,2425.52 12823,3027.52 ; 12823,2425.52 14097,2425.52 ; 12823,2425.52 14097,2425.52 ; 12823,3027.52 14097,3027.52 ; 12825,13.69 14099,13.69 ; 12825,13.69 12825,615.68 ; 12825,615.68 12825,1217.68 ; 12825,615.68 14099,615.68 ; 12825,615.68 14099,615.68 ; 12825,1217.68 14099,1217.68 ; 14097,1218 14097,1820 ; 14097,1218 14566,1218 ; 14097,1218 14566,1218 ; 14097,1820 14566,1820 14566,1218 ; 14097,1820.52 14566,1820.52 ; 14097,1820.52 14566,1820.52 ; 14097,1820.52 14097,2422.52 ; 14097,2422.52 14566,2422.52 14566,1820.52 ; 14097,2425.52 14097,3027.52 ; 14097,2425.52 14566,2425.52 ; 14097,2425.52 14566,2425.52 ; 14097,3027.52 14566,3027.52 14566,2425.52 ; 14099,13.69 14568,13.69 ; 14099,13.69 14099,615.68 ; 14099,615.68 14099,1217.68 ; 14099,615.68 14568,615.68 ; 14099,615.68 14568,615.68 ; 14099,1217.68 14568,1217.68 ; 14568,13.69 15593,13.69 ; 14568,13.69 14568,615.68 ; 14568,615.68 15593,615.68 ; 14568,615.68 15593,615.68 ; 14568,615.68 14568,1217.68 ; 14568,1217.68 15593,1217.68 ; 14568,1217.68 15593,1217.68 ; 14568,1217.68 14568,1819.68 ; 14568,1819.68 14568,3625.68 ; 14568,1819.68 15593,1819.68 ; 14568,1819.68 15593,1819.68 ; 14568,3625.68 14568,4950 17643,4950 17643,3625.68 ; 14568,3625.68 15593,3625.68 ; 15593,13.69 17644,13.69 17644,615.68 15593,615.68 ; 15593,13.69 15593,615.68 ; 15593,615.68 16618,615.68 17643,615.68 17643,1217.68 ; 15593,1217.68 16618,1217.68 ; 15593,1217.68 16618,1217.68 ; 15593,1217.68 15593,1819.68 ; 15593,1819.68 16618,1819.68 ; 15593,1819.68 15593,2421.68 ; 15593,1819.68 16618,1819.68 ; 15593,2421.68 16618,2421.68 ; 15593,2421.68 16618,2421.68 ; 15593,2421.68 14568,2421.68 15593,2421.68 ; 15593,2421.68 15593,3023.68 ; 15593,3023.68 16618,3023.68 ; 15593,3023.68 16618,3023.68 ; 15593,3023.68 14568,3023.68 15593,3023.68 ; 15593,3023.68 15593,3625.68 ; 15593,3625.68 16618,3625.68 17643,3625.68 ; 16618,1217.68 17643,1217.68 ; 16618,1217.68 16618,1819.68 ; 16618,1819.68 17643,1819.68 ; 16618,3023.68 17643,3023.68 ; 17643,1217.68 17643,1819.68 ; 17643,1819.68 17643,3023.68 ; 17643,3023.68 17643,3618.68 17643,3625.68
  text "SOUTHERN STATES, LLC / 30 GEORGIA AVE / HAMPTON, GA 30028" at 14671,4280 h120
  text "11/08/2021" at 15631,3875.68 h120
  text "aBOM Version" at 14606,3835.68 h120
  text "N/A" at 15631,3275.68 h120
  text "ASSY  / VERSION" at 14606,3235.68 h120
  text "C" at 7146,3125 h120
  text "-" at 7606,3115 h120
  text "42JxBx_EngProto_eBOM_11082021" at 15641,2671.68 h120
  text "eBOM / VERSION" at 14606,2633.68 h120
  text "B" at 7131,2565 h120
  text "-" at 7566,2560 h120
  text "Rev (-) 11/22/2021" at 15651,2051.68 h120
  text "PCB / VERSION" at 14606,2031.68 h120
  text "A" at 7136,1905 h120
  text "-" at 7596,1900 h120
  text "DRAWN BY" at 14626,1449.68 h120
  text "NMULKEY" at 15651,1449.68 h120
  text "11/22/2021" at 16676,1449.68 h120
  text "(-)" at 7136,1375 h120
  text "PCB Copper Corrections" at 7591,1375 h120
  text "11/22/2021" at 12895,1375 h120
  text "ENGINEERING RELEASE" at 7581,847.68 h120
  text "11/08/2021" at 12883,847.68 h120
  text "NAM" at 14157,847.68 h120
  text "0" at 7146,846 h120
  text "PN:  42JxBx_EngProto / 42 Pin Junction Box Conversion PCB" at 14583,632 h120
  text "42JxBx_EngProto" at 15671,269.69 h120
  text "REV" at 7112,245.69 h120
  text "DESCRIPTION" at 7581,245.69 h120
  text "DATE" at 12883,245.69 h120
  text "BY" at 14157,245.69 h120
  text "PART  / NUMBER" at 14606,225.69 h120
Board Outline:
  circle w10: c3604,2348.5 r50
  circle w10: c3604,433.5 r50
  circle w10: c432,433.5 r50
  circle w10: c432,2348.5 r50
  lines w10: 358,2781 358,2426 0,2426 0,356 358,356 358,0 3678,0 3678,356 4036,356 4036,2426 3678,2426 3678,2780 359,2780

## Dimensions
4080,7 to 4079,2801 on Mechanical 1
4079,2801 to 0,2798 on Mechanical 1